# EAGLE board memory (EAGLE 8.5.0)
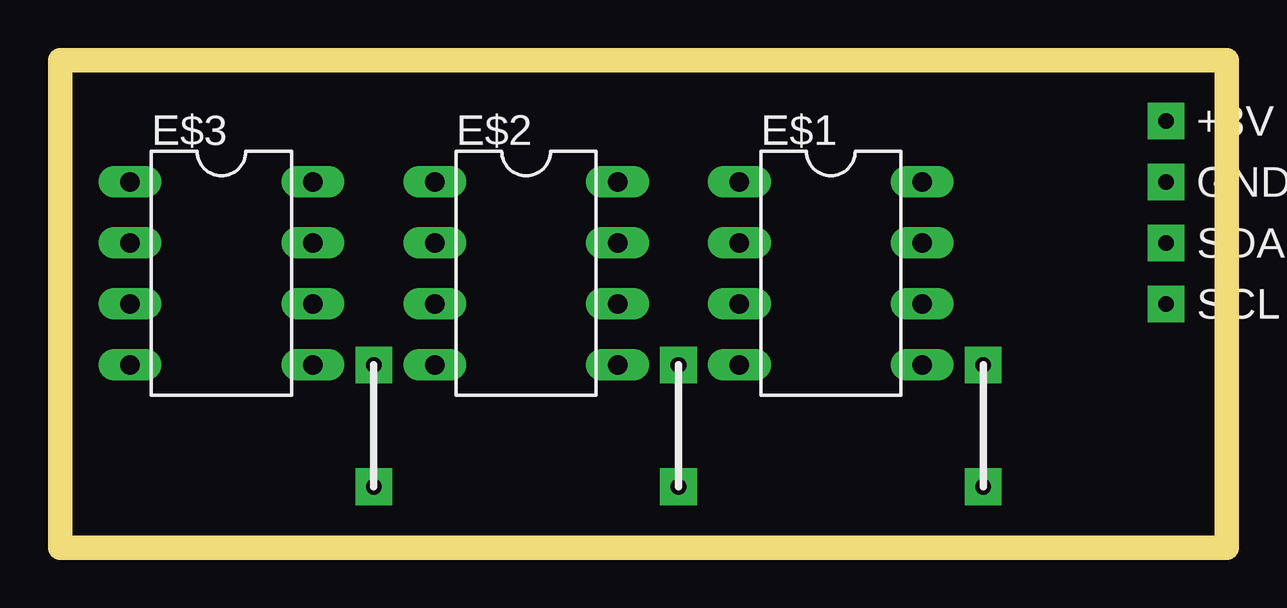
[diagram p0: board, top side]
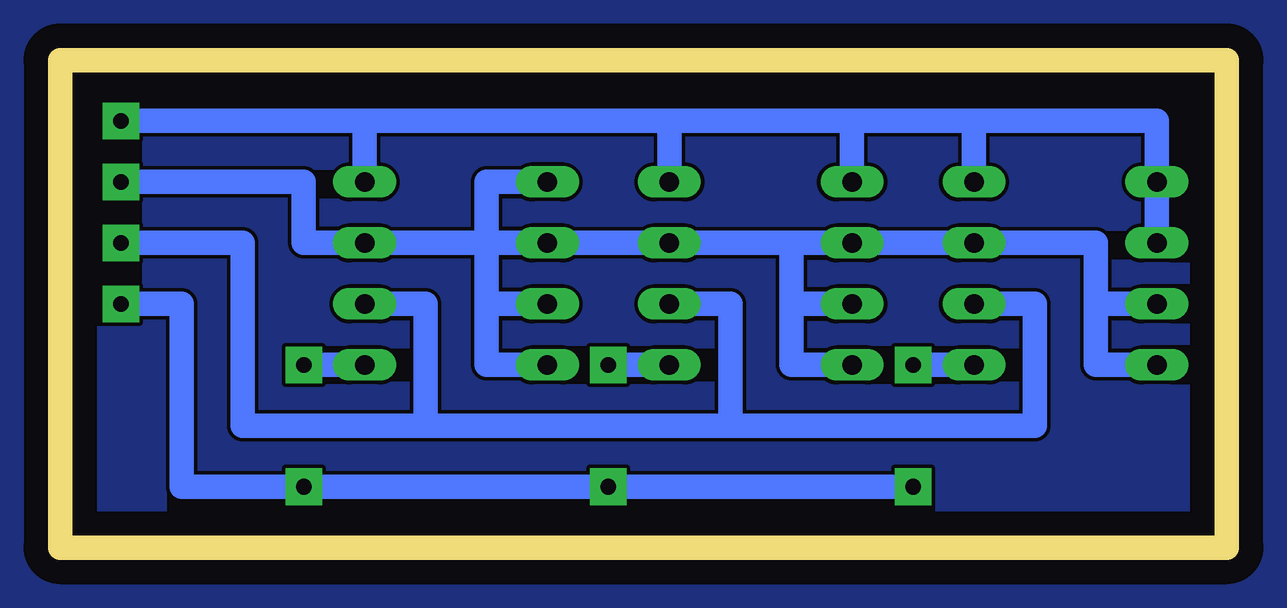
[diagram p1: board, bottom side, seen from below]

Size 48.64 x 20.32 mm. Coordinates in mm from the lower left corner, seen from the top.
Outline: 0,0 0,20.32 48.64,20.32 48.64,0 0,0
Copper layers (1*16): Top 0.035mm / dielectric 1.5mm / Bottom 0.035mm
Design rules "default": minimum track width 6mil, minimum drill 0.35mm, track to track 6mil, track to pad 6mil, pad to pad 6mil, via to via 6mil, smd to smd 6mil, copper to edge 40mil, drill to drill 6mil, minimum pad ring 10mil, minimum via ring 8mil, stop-mask expansion 4mil, vias tented up to drill 0mil, thermal gap 10mil

## Footprints (pad centres in the part's own frame; a part is rotated, then mirrored left to right if it is on the bottom)
DIL08 = drill 0.813 long: 1 -3.81,-3.81; 2 -1.27,-3.81; 3 1.27,-3.81; 4 3.81,-3.81; 5 3.81,3.81; 6 1.27,3.81; 7 -1.27,3.81; 8 -3.81,3.81

## Placement (x,y rotation side)
E$1  [DIL08]  32.13,11.43 270 top
E$2  [DIL08]  19.43,11.43 270 top
E$3  [DIL08]  6.73,11.43 270 top

## Library data of the parts
E$1-E$3 = 40xx

## Nets
S$1: E$1.8 E$2.1 E$2.8 E$3.2 E$3.8
S$3: E$1.1 E$1.3 E$1.4
S$4: E$3.6
S$5: E$2.6
S$6: E$1.6
S$9: E$3.5
S$11: E$2.5
S$12: E$1.5
S$16: E$2.3 E$2.4 E$3.3 E$3.4 E$3.7

## Tracks (layer width: path | path; a pad name or v marks a point on that pad's centre or on a via)
S$1  (via drill 0.65 pad 1.52)
  Bottom 1.016: v46.1,17.78 35.94,17.78 | 35.94,17.78 E$1.8 | 35.94,17.78 23.24,17.78 | 23.24,17.78 E$2.8 | 23.24,17.78 15.62,17.78 | 15.62,17.78 10.54,17.78 | 10.54,17.78 E$3.8 | E$2.1 15.62,17.78 | 10.54,17.78 2.92,17.78 E$3.2
S$2
  pour Bottom: -3.43,24.13 -3.43,-3.81 52.45,-3.81 52.45,24.13
S$3
  Bottom 1.016: E$1.1 30.86,15.24 30.86,10.16 | 30.86,10.16 E$1.3 | 30.86,10.16 30.86,7.62 E$1.4
S$4  (via drill 0.65 pad 1.52)
  Bottom 1.016: E$3.6 8,10.16 8,5.08 41.02,5.08 41.02,12.7 v46.1,12.7
S$5
  Bottom 1.016: E$2.6 20.7,10.16 20.7,5.08
S$6
  Bottom 1.016: E$1.6 33.4,10.16 33.4,5.08
S$9  (via drill 0.65 pad 1.52)
  Bottom 1.016: E$3.5 v13.08,7.62
S$11  (via drill 0.65 pad 1.52)
  Bottom 1.016: E$2.5 v25.78,7.62
S$12  (via drill 0.65 pad 1.52)
  Bottom 1.016: E$1.5 v38.48,7.62
S$13  (via drill 0.65 pad 1.52)
  Bottom 1.016: v13.08,2.54 43.56,2.54 43.56,10.16 v46.1,10.16
S$14  (via drill 0.65 pad 1.52)
  other vias: 25.78,2.54
S$15  (via drill 0.65 pad 1.52)
  other vias: 38.48,2.54
S$16  (via drill 0.65 pad 1.52)
  Bottom 1.016: v46.1,15.24 38.48,15.24 38.48,12.7 18.16,12.7 | 18.16,12.7 E$3.7 5.46,12.7 5.46,10.16 | 18.16,12.7 18.16,10.16 | 18.16,10.16 E$2.3 | 18.16,10.16 18.16,7.62 E$2.4 | 5.46,10.16 E$3.3 | 5.46,10.16 5.46,7.62 E$3.4

## Text on the board
tPlace: +3V | GND | SDA | SCL